# Altium PCB pcb.PcbDoc
Units mm, origin at the board's own origin, x right, y up, seen from the top; angles counter-clockwise.
Board outline 96.77 x 55.5 mm, 2 copper layers (Top Layer, Bottom Layer), stack 0.325 mm thick; 80 components, 66 nets, 417 pads, 79 vias.
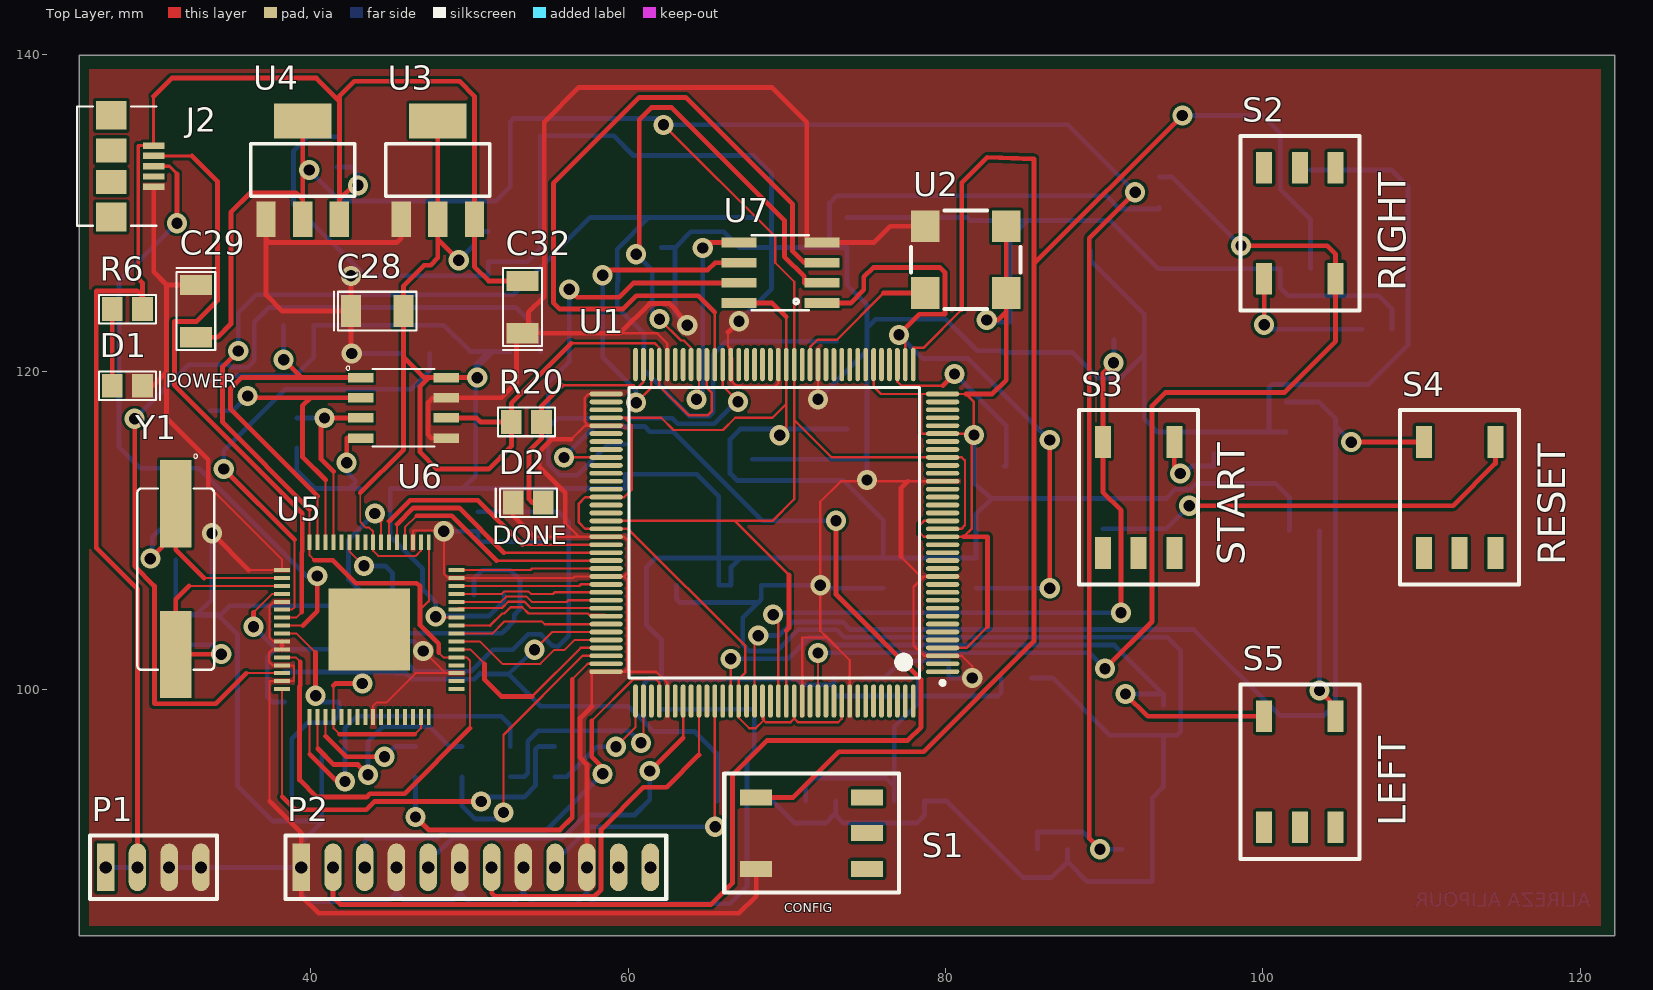
[diagram p0: Top Layer view]
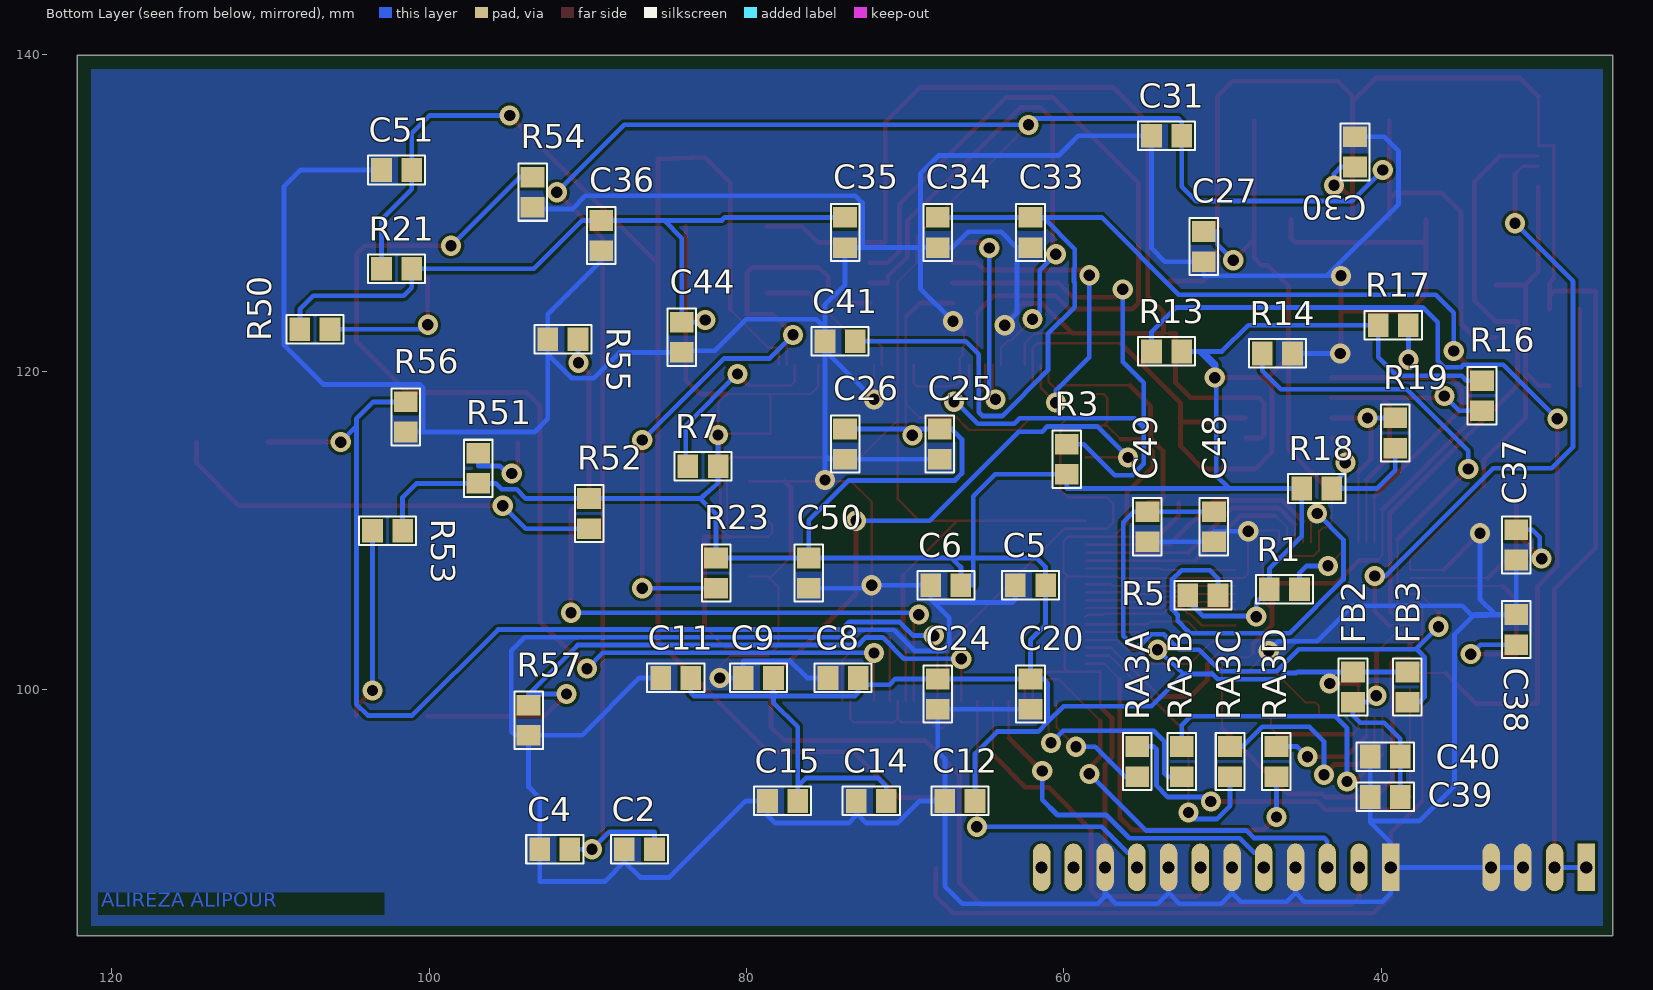
[diagram p1: Bottom Layer view, seen from below]
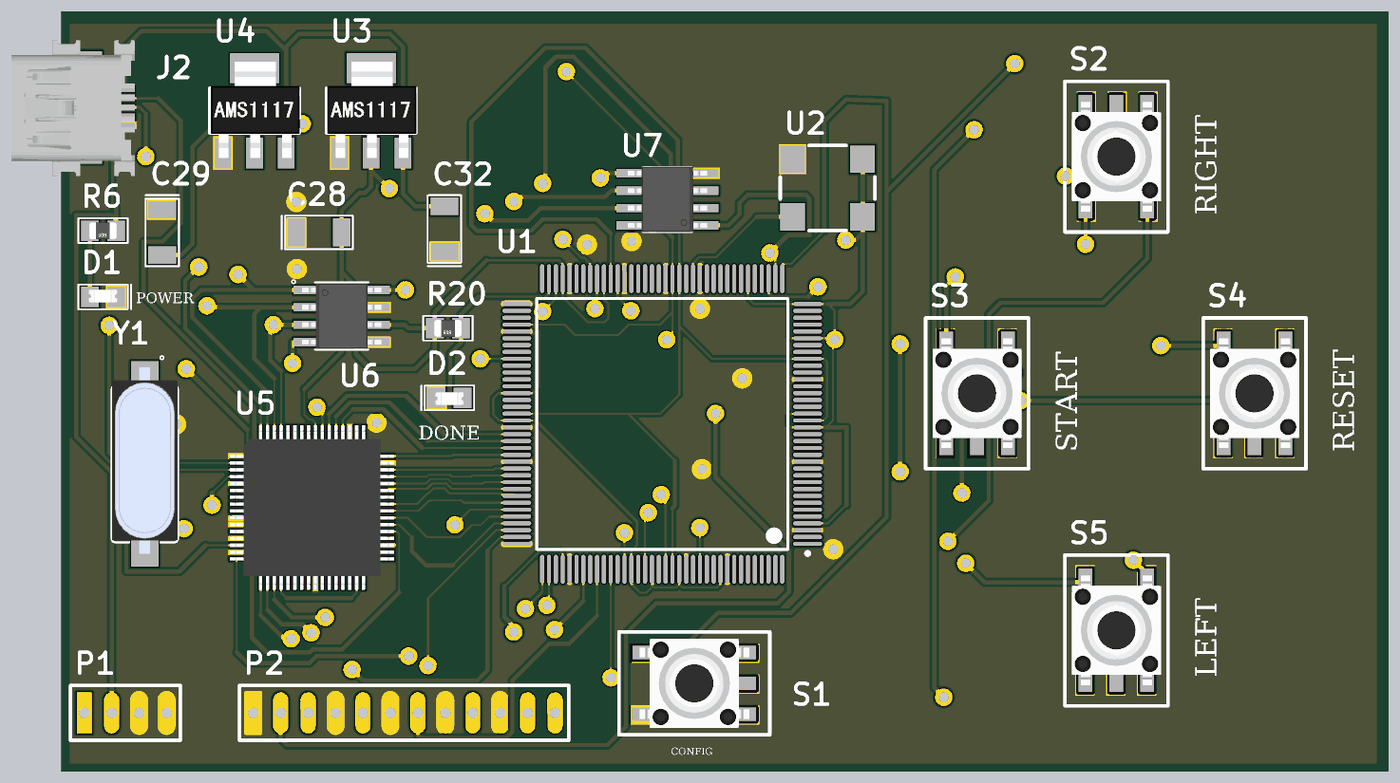
[diagram p2: 3D render of the assembled board from above, using the file's embedded part models]
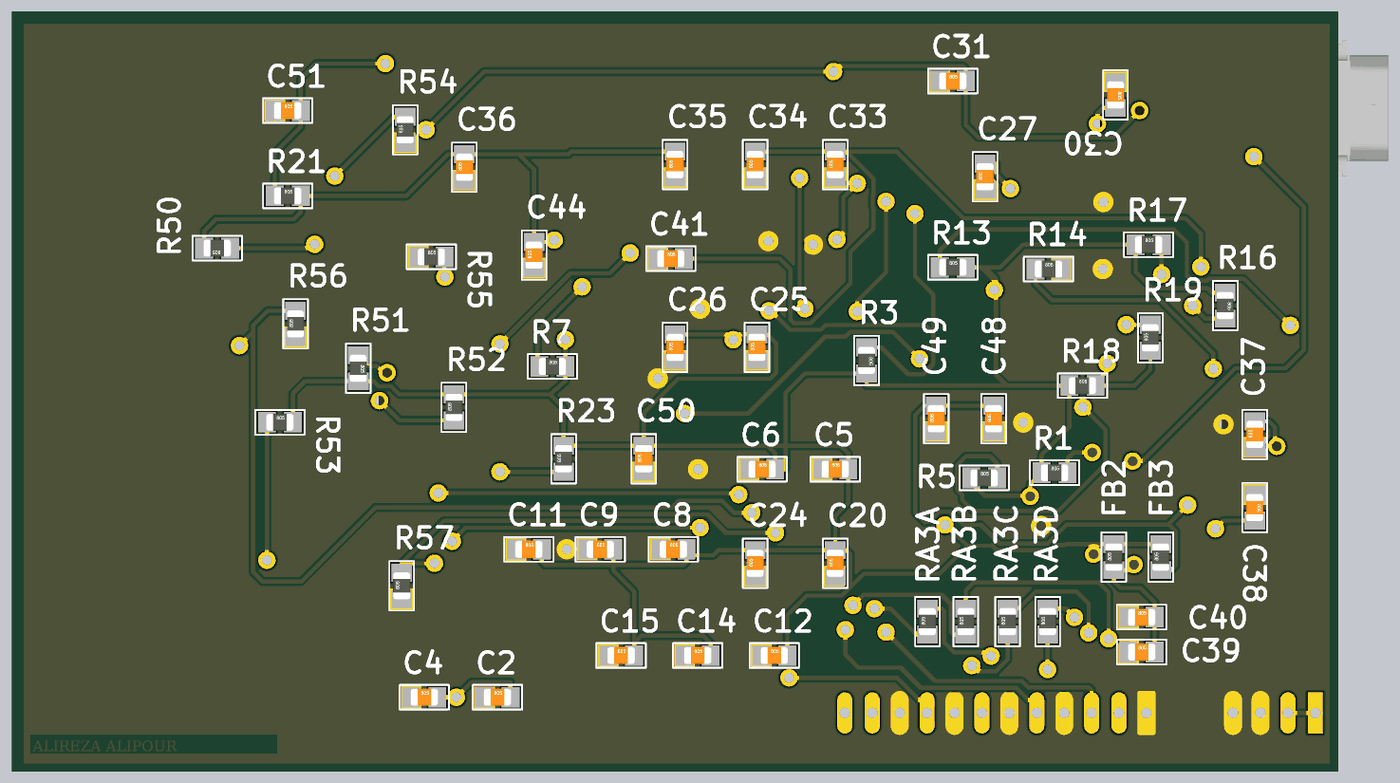
[diagram p3: 3D render of the assembled board from below, using the file's embedded part models]

## Layer stack, top to bottom
Top Solder: solder mask 0.0102, Solder Resist, Dk 3.5
Top Layer: signal copper 0.0356
Dielectric 1: core 0.254, FR-4, Dk 4.2
Bottom Layer: signal copper 0.0356
Bottom Solder: solder mask 0.0102, Solder Resist, Dk 3.5

## Board outline
25.4,84.455 122.174,84.455 122.174,139.954 25.4,139.954

## Design rules (kind name [scope] priority, off if disabled: settings)
Clearance [All] p1: gap=0.18 ignorepadtopadclearanceinfootprint=FALSE
PlaneConnect [All] p1: planeconnectstyle=Direct reliefexpansion=0.508 reliefentries=4 reliefconductorwidth=0.254 reliefairgap=0.254
PolygonConnect [All] p1: connectstyle=Direct reliefconductorwidth=0.254 reliefentries=4 polygonreliefangle="90 Angle" airgapwidth=0.254
RoutingVias [All] p1: holewidth=0.711 width=1.27 viastyle="Through Hole" minholewidth=0.711 minwidth=1.27 maxholewidth=0.711 maxwidth=1.27
SMDNeckDown [All] p1: percent=50.000
SolderMaskExpansion [All] p1: expansion=0.102
Width [All] p1: maxlimit=0.9 minlimit=0.2 preferedwidth=0.3
29 further rules are at their usual default settings.

## Classes and differential pairs
component class s1: C27 C28 C29 C30 C31 C32 D1 R6 U3 U4
component class s2: C2 C4 C5 C6 C8 C9 C11 C12 C14 C15 C20 C24 C25 C26 C50 C51 D2 R3 R7 R20 R21 R23 RA3A RA3B RA3C RA3D S1 U1 U2 U7
component class s4: C33 C34 C35 C36 C37 C38 C39 C40 C41 C44 C48 C49 FB2 FB3 J2 P1 P2 R1 R5 R13 R14 R16 R17 R18 R19 R50 R51 R52 R53 R54 R55 R56 R57 S2 S3 S4 S5 U5 U6 Y1
net class FT_FIFO: FT_D0 FT_D1 FT_D2 FT_D3 FT_D4 FT_D5 FT_D6 FT_D7 FT_RD_N FT_RXF_N FT_TXE_N FT_WR_N
net class FT_JTAG: FT_TCK FT_TDI FT_TDO FT_TMS

## Components (designator, comment, footprint, x,y, rotation, side; value= is the part's Value field where it differs from the comment)
C2 "Cap" "0805 CAP" 86.741,89.916 r180 bottom value=4.7uF
C4 "Cap" "0805 CAP" 92.075,89.916 r180 bottom value=0.47uF
C5 "Cap" "0805 CAP" 62.103,106.553 r180 bottom value=4.7uF
C6 "Cap" "0805 CAP" 67.437,106.553 r180 bottom value=0.47uF
C8 "Cap" "0805 CAP" 73.914,100.711 r180 bottom value=4.7uF
C9 "Cap" "0805 CAP" 79.248,100.711 r180 bottom value=0.47uF
C11 "Cap" "0805 CAP" 84.455,100.711 r180 bottom value=4.7uF
C12 "Cap" "0805 CAP" 66.548,92.964 r180 bottom value=0.47uF
C14 "Cap" "0805 CAP" 72.136,92.964 r180 bottom value=4.7uF
C15 "Cap" "0805 CAP" 77.724,92.964 r180 bottom value=0.47uF
C20 "Cap" "0805 CAP" 62.103,99.695 r90 bottom value=4.7uF
C24 "Cap" "0805 CAP" 67.945,99.695 r90 bottom value=0.47uF
C25 "Cap" "0805 CAP" 67.818,115.443 r90 bottom value=4.7uF
C26 "Cap" "0805 CAP" 73.787,115.443 r90 bottom value=100nF
C27 "Cap" "0805 CAP" 51.181,127.889 r90 bottom value=100nF
C28 "Tantalum" CT1206_TANTALUM-SMD-10UF-20V-20%(1206)(Primary) 44.196,123.825 r180 top value=10uF/16V
C29 "Tantalum" CT1206_TANTALUM-SMD-10UF-20V-20%(1206)(Primary) 32.766,123.825 r90 top value=10uF/16V
C30 "Cap" "0805 CAP" 41.656,133.858 r270 bottom value=100nF
C31 "Cap" "0805 CAP" 53.528,134.874 r180 bottom value=100nF
C32 "Tantalum" CT1206_TANTALUM-SMD-10UF-20V-20%(1206)(Primary) 53.34,124.079 r270 top value=47uF/10V
C33 "Cap" "0805 CAP" 62.103,128.778 r90 bottom value=4.7uF
C34 "Cap" "0805 CAP" 67.945,128.778 r90 bottom value=100nF
C35 "Cap" "0805 CAP" 73.787,128.778 r90 bottom value=100nF
C36 "27pF" "0805 CAP" 89.154,128.585 r90 bottom value=100nF
C37 "27pF" "0805 CAP" 31.496,109.093 r90 bottom
C38 "Cap" "0805 CAP" 31.496,103.759 r270 bottom value=27pF
C39 "27pF" "0805 CAP" 39.751,93.218 r180 bottom value=4.7uF
C40 "27pF" "0805 CAP" 39.751,95.758 r180 bottom value=100nF
C41 "Cap" "0805 CAP" 74.102,121.92 r180 bottom value=100nF
C44 "Cap" "0805 CAP" 84.074,122.174 r90 bottom value=100nF
C48 "27pF" "0805 CAP" 50.546,110.236 r90 bottom value=4.7uF
C49 "27pF" "0805 CAP" 54.737,110.236 r90 bottom value=100nF
C50 "Cap" "0805 CAP" 76.073,107.315 r90 bottom value=100nF
C51 "Cap" "0805 CAP" 102.042,132.715 r180 bottom value=100nF
D1 "RED" "0805 LED" 28.448,119.126 r0 top
D2 "Green" "0805 LED" 53.713,111.76 r180 top
FB2 "Res1" "0805 RES" 41.783,100.137 r90 bottom value="600R, 0.5A"
FB3 "Res1" "0805 RES" 38.354,100.137 r90 bottom value="600R, 0.5A"
J2 "105017-0001" MOLEX_105017-0001 27.432,132.953 r270 top
P1 "MHDR1X4" "4 PIN" 27.083,88.773 r0 top
P2 "MHDR1X12" "12 PIN" 39.403,88.773 r0 top
R1 "Res1" "0805 RES" 46.101,106.299 r180 bottom value=4.7K
R3 "Res1" "0805 RES" 59.817,114.488 r270 bottom value=4.7K
R5 "Res1" "0805 RES" 51.242,105.918 r180 bottom value=4.7K
R6 "1.2K" "0805 RES" 28.448,123.952 r180 top
R7 "Res1" "0805 RES" 82.738,114.046 r180 bottom value=4.7K
R13 "Res1" "0805 RES" 53.528,121.285 r180 bottom value=1.2K
R14 "Res1" "0805 RES" 46.548,121.158 r180 bottom value="12K 1%"
R16 "Res1" "0805 RES" 33.655,118.491 r270 bottom value=4.7K
R17 "Res1" "0805 RES" 39.243,122.936 r180 bottom value=4.7K
R18 "Res1" "0805 RES" 44.069,112.649 r180 bottom value=4.7K
R19 "Res1" "0805 RES" 39.116,116.144 r90 bottom value=2.2K
R20 "Res1" "0805 RES" 53.594,116.84 r180 top value=330
R21 "Res1" "0805 RES" 102.042,126.492 r180 bottom value=4.7K
R23 "Res1" "0805 RES" 81.915,107.315 r90 bottom value=4.7K
R50 "Res1" "0805 RES" 107.188,122.682 r0 bottom value=470
R51 "Res1" "0805 RES" 96.901,113.919 r270 bottom value=470
R52 "Res1" "0805 RES" 89.916,111.064 r90 bottom value=470
R53 "Res1" "0805 RES" 102.616,109.982 r180 bottom value=470
R54 "Res1" "0805 RES" 93.472,131.318 r90 bottom value=10K
R55 "Res1" "0805 RES" 91.567,122.047 r180 bottom value=10K
R56 "Res1" "0805 RES" 101.473,117.155 r90 bottom value=10K
R57 "Res1" "0805 RES" 93.726,98.044 r90 bottom value=10K
RA3A "Res1" "0805 RES" 55.372,95.438 r90 bottom value=22
RA3B "Res1" "0805 RES" 52.578,95.438 r90 bottom value=22
RA3C "Res1" "0805 RES" 49.53,95.438 r90 bottom value=22
RA3D "Res1" "0805 RES" 46.609,95.438 r90 bottom value=22
S1 "SW-PB" "Tack Switch" 66.557,92.182 r90 top
S2 "SW-PB" "Tack Switch" 101.076,124.357 r180 top
S3 "SW-PB" "Tack Switch" 93.416,117.085 r0 top
S4 "SW-PB" "Tack Switch" 113.645,117.085 r0 top
S5 "SW-PB" "Tack Switch" 103.576,99.798 r0 top
U1 "XC6SLX9-2TQG144C" TQG144_M 69.215,109.855 r180 top
U2 "50MHz Osillator - MEC" "50MHz Osillator - MEC" 89.22,128.468 r180 top
U3 "AMS1117-3V3" AMS1117_AMS1117(Primary) 48.006,132.715 r0 top
U4 "AMS1117-1V2" AMS1117_AMS1117(Primary) 39.497,132.715 r0 top
U5 "FT2232HL" LQFP64 43.688,103.759 r0 top
U6 "M93C56MN" SOIC127P600X175-8N 45.847,117.729 r0 top
U7 "W25Q64FV" "SO08 - duplicate" 69.596,126.238 r90 top
Y1 "12MHz" XTAL1170X500X450 31.496,106.934 r270 top

## Footprints (in the part's own frame and the unit in brackets; to place one, negate y for a bottom-side part, rotate by r counter-clockwise, add the part's x,y. Pads: shape width x height; smd on the part's side, far side on the other; paste and mask are expansions set on the pad)
"4 PIN" [mm]
  rect 1.1x3 hole 0.762: 1(0,0)
  oval 1.1x3 hole 0.762: 2(2,0) 3(4,0) 4(6,0)
  silkscreen extent -1,-2 7,2
"12 PIN" [mm]
  rect 1.1x3 hole 0.762: 1(0,0)
  oval 1.1x3 hole 0.762: 2(2,0) 3(4,0) 4(6,0) 5(8,0) 6(10,0) 7(12,0) 8(14,0) 9(16,0) 10(18,0) 11(20,0) 12(22,0)
  silkscreen extent -1,-2 23,2
"50MHz Osillator - MEC" [mm]
  rect 1.8x2 smd paste-25.4 mask-25.4: 1(5.4,-0.7) 2(10.5,-0.7) 3(10.5,3.5) 4(5.4,3.5)
  silkscreen extent 4.5,-1.7 11.4,4.5
"0805 CAP" [mm]
  rect 1.3x1.5 smd paste-25.4 mask-25.4: 1(-0.95,0) 2(0.95,0)
  silkscreen extent -1.8,-0.9 1.8,0.9, body extent -1,-0.62 1,0.62, height 0.78
"0805 LED" [mm]
  rect 1.3x1.5 smd paste-25.4 mask-25.4: 1(-0.95,0) 2(0.95,0)
  silkscreen extent -1.8,-0.9 2.05,0.9, body extent -1.03,-0.4 1.03,0.51, height 0.85
"0805 RES" [mm]
  rect 1.3x1.5 smd paste-25.4 mask-25.4: 1(-0.95,0) 2(0.95,0)
  silkscreen extent -1.8,-0.9 1.8,0.9, body extent -1,-0.63 1,0.63, height 0.78
AMS1117_AMS1117(Primary) [mil]
  rect 48x88 smd paste-1000 mask-1000: GND(-91,-122) VIN(91,-122) VOUT(0,-122)
  rect 141.73x86.61 smd paste-1000 mask-1000: HEATSINK(0,122.01)
  silkscreen extent -129,-65 129,65, body extent -126,-136 130,140, height 73
CT1206_TANTALUM-SMD-10UF-20V-20%(1206)(Primary) [mil]
  rect 50x80 smd paste-1000 mask-1000: 1(-65,0) 2(65,0)
  silkscreen extent -97,-48 107,48
LQFP64 [mm]
  rect 1x0.25 smd paste-25.4 mask-25.4: 1(-5.5,3.75) 2(-5.5,3.25) 3(-5.5,2.75) 4(-5.5,2.25) 5(-5.5,1.75) 6(-5.5,1.25) 7(-5.5,0.75) 8(-5.5,0.25) 9(-5.5,-0.25) 10(-5.5,-0.75) 11(-5.5,-1.25) 12(-5.5,-1.75) 13(-5.5,-2.25) 14(-5.5,-2.75) 15(-5.5,-3.25) 16(-5.5,-3.75) 33(5.5,-3.75) 34(5.5,-3.25) 35(5.5,-2.75) 36(5.5,-2.25) 37(5.5,-1.75) 38(5.5,-1.25) 39(5.5,-0.75) 40(5.5,-0.25) 41(5.5,0.25) 42(5.5,0.75) 43(5.5,1.25) 44(5.5,1.75) 45(5.5,2.25) 46(5.5,2.75) 47(5.5,3.25) 48(5.5,3.75)
  rect 0.25x1 smd paste-25.4 mask-25.4: 17(-3.75,-5.5) 18(-3.25,-5.5) 19(-2.75,-5.5) 20(-2.25,-5.5) 21(-1.75,-5.5) 22(-1.25,-5.5) 23(-0.75,-5.5) 24(-0.25,-5.5) 25(0.25,-5.5) 26(0.75,-5.5) 27(1.25,-5.5) 28(1.75,-5.5) 29(2.25,-5.5) 30(2.75,-5.5) 31(3.25,-5.5) 32(3.75,-5.5) 49(3.75,5.5) 50(3.25,5.5) 51(2.75,5.5) 52(2.25,5.5) 53(1.75,5.5) 54(1.25,5.5) 55(0.75,5.5) 56(0.25,5.5) 57(-0.25,5.5) 58(-0.75,5.5) 59(-1.25,5.5) 60(-1.75,5.5) 61(-2.25,5.5) 62(-2.75,5.5) 63(-3.25,5.5) 64(-3.75,5.5)
  rect 5.15x5.15 smd paste-25.4 mask-25.4: PAD(0,0)
  body extent -6,-6 6,6, height 1.56
MOLEX_105017-0001 [mm]
  rect 0.4x1.35 smd paste-25.4 mask-25.4: 1(-1.3,2.675) 2(-0.65,2.675) 3(0,2.675) 4(0.65,2.675) 5(1.3,2.675)
  rect 1.5x1.9 smd paste-25.4 mask-25.4: P$8(-1,0) P$9(1,0)
  rect 1.8x1.9 smd paste-25.4 mask-25.4: P$10(-3.2,0) P$11(3.2,0)
  silkscreen extent -3.75,-2.15 3.75,2.85, body extent -4.9,-5.65 5,3.35, height 3.95
"SO08 - duplicate" [mil]
  rect 24x87 smd paste-1000 mask-1000: 1(-75,-103) 2(-25,-103) 3(25,-103) 4(75,-103) 5(75,103) 6(25,103) 7(-25,103) 8(-75,103)
  silkscreen extent -93,-71 93,71, body extent -94,-114 94,114, height 69
SOIC127P600X175-8N [mm]
  rect 1.6x0.6 smd paste-25.4 mask-25.4: 1(-2.7,1.905) 2(-2.7,0.635) 3(-2.7,-0.635) 4(-2.7,-1.905) 5(2.7,-1.905) 6(2.7,-0.635) 7(2.7,0.635) 8(2.7,1.905)
  silkscreen extent -3.63,-2.45 1.95,2.63, body extent -2.9,-2.4 2.9,2.4, height 1.75
"Tack Switch" [mm]
  rect 1x2 smd paste-25.4 mask-25.4: 1(-3.5,-1.5) 2(-3.5,-8.5) 3(1,-1.5) 4(1,-8.5) 5(-1.25,-8.5)
  silkscreen extent -5,-10.5 2.5,0.5, body extent -4.5,-9 2,-1, height 5
TQG144_M [mm] "Thin QFP, 144-Leads, Body 20x20mm, Pitch 0.5mm, IPC Low Density"
  oval 2.1x0.3 smd: 1(-10.6,8.75) 2(-10.6,8.25) 3(-10.6,7.75) 4(-10.6,7.25) 5(-10.6,6.75) 6(-10.6,6.25) 7(-10.6,5.75) 8(-10.6,5.25) 9(-10.6,4.75) 10(-10.6,4.25) 11(-10.6,3.75) 12(-10.6,3.25) 13(-10.6,2.75) 14(-10.6,2.25) 15(-10.6,1.75) 16(-10.6,1.25) 17(-10.6,0.75) 18(-10.6,0.25) 19(-10.6,-0.25) 20(-10.6,-0.75) 21(-10.6,-1.25) 22(-10.6,-1.75) 23(-10.6,-2.25) 24(-10.6,-2.75) 25(-10.6,-3.25) 26(-10.6,-3.75) 27(-10.6,-4.25) 28(-10.6,-4.75) 29(-10.6,-5.25) 30(-10.6,-5.75) 31(-10.6,-6.25) 32(-10.6,-6.75) 33(-10.6,-7.25) 34(-10.6,-7.75) 35(-10.6,-8.25) 36(-10.6,-8.75) 73(10.6,-8.75) 74(10.6,-8.25) 75(10.6,-7.75) 76(10.6,-7.25) 77(10.6,-6.75) 78(10.6,-6.25) 79(10.6,-5.75) 80(10.6,-5.25) 81(10.6,-4.75) 82(10.6,-4.25) 83(10.6,-3.75) 84(10.6,-3.25) 85(10.6,-2.75) 86(10.6,-2.25) 87(10.6,-1.75) 88(10.6,-1.25) 89(10.6,-0.75) 90(10.6,-0.25) 91(10.6,0.25) 92(10.6,0.75) 93(10.6,1.25) 94(10.6,1.75) 95(10.6,2.25) 96(10.6,2.75) 97(10.6,3.25) 98(10.6,3.75) 99(10.6,4.25) 100(10.6,4.75) 101(10.6,5.25) 102(10.6,5.75) 103(10.6,6.25) 104(10.6,6.75) 105(10.6,7.25) 106(10.6,7.75) 107(10.6,8.25) 108(10.6,8.75)
  oval 0.3x2.1 smd: 37(-8.75,-10.6) 38(-8.25,-10.6) 39(-7.75,-10.6) 40(-7.25,-10.6) 41(-6.75,-10.6) 42(-6.25,-10.6) 43(-5.75,-10.6) 44(-5.25,-10.6) 45(-4.75,-10.6) 46(-4.25,-10.6) 47(-3.75,-10.6) 48(-3.25,-10.6) 49(-2.75,-10.6) 50(-2.25,-10.6) 51(-1.75,-10.6) 52(-1.25,-10.6) 53(-0.75,-10.6) 54(-0.25,-10.6) 55(0.25,-10.6) 56(0.75,-10.6) 57(1.25,-10.6) 58(1.75,-10.6) 59(2.25,-10.6) 60(2.75,-10.6) 61(3.25,-10.6) 62(3.75,-10.6) 63(4.25,-10.6) 64(4.75,-10.6) 65(5.25,-10.6) 66(5.75,-10.6) 67(6.25,-10.6) 68(6.75,-10.6) 69(7.25,-10.6) 70(7.75,-10.6) 71(8.25,-10.6) 72(8.75,-10.6) 109(8.75,10.6) 110(8.25,10.6) 111(7.75,10.6) 112(7.25,10.6) 113(6.75,10.6) 114(6.25,10.6) 115(5.75,10.6) 116(5.25,10.6) 117(4.75,10.6) 118(4.25,10.6) 119(3.75,10.6) 120(3.25,10.6) 121(2.75,10.6) 122(2.25,10.6) 123(1.75,10.6) 124(1.25,10.6) 125(0.75,10.6) 126(0.25,10.6) 127(-0.25,10.6) 128(-0.75,10.6) 129(-1.25,10.6) 130(-1.75,10.6) 131(-2.25,10.6) 132(-2.75,10.6) 133(-3.25,10.6) 134(-3.75,10.6) 135(-4.25,10.6) 136(-4.75,10.6) 137(-5.25,10.6) 138(-5.75,10.6) 139(-6.25,10.6) 140(-6.75,10.6) 141(-7.25,10.6) 142(-7.75,10.6) 143(-8.25,10.6) 144(-8.75,10.6)
  silkscreen extent -10.73,-9.15 9.15,9.57, body extent -10,-10 10,10, height 1.6
XTAL1170X500X450 [mm]
  rect 5.5x2 smd paste-25.4 mask-25.4: 1(-4.75,0) 2(4.75,0)
  silkscreen extent -7.88,-2.41 5.72,2.41, body extent -7.04,-2.4 6.54,2.4, height 3.85

## Part data
C2 C4 C5 C6 C8 C9 C11 C12 C14 C15 C20 C24 C25 C26 C27 C30 C31 C33 C34 C35 C38 C41 C44 C50 C51: "Capacitor", LatestRevisionDate=17-Jul-2002, LatestRevisionNote="Re-released for DXP Platform.", PackageDescription="Radial Cap, Thru-Hole; 2 Leads; 0.3 in Pin Spacing", PackageReference=RAD-0.3, Published=8-Jun-2000, Publisher="Altium Limited"
C28 C29 C32: library part "Cap Pol3", "Polarized Capacitor (Surface Mount)", LatestRevisionDate=29-May-2009, LatestRevisionNote="IPC-7351 Footprint Added.", PackageDescription="Chip Capacitor", PackageReference=C0805, Published=8-Jun-2000, Publisher="Altium Limited"
C36 C37 C39 C40 C48 C49: library part Cap, "Capacitor", LatestRevisionDate=17-Jul-2002, LatestRevisionNote="Re-released for DXP Platform.", PackageDescription="Radial Cap, Thru-Hole; 2 Leads; 0.3 in Pin Spacing", PackageReference=RAD-0.3, Published=8-Jun-2000, Publisher="Altium Limited"
D1 D2: library part LED0, "Typical INFRARED GaAs LED", LatestRevisionDate=08-Jul-2005, LatestRevisionNote="Mech Layer 1 removed.", PackageDescription="LED; 2 Leads", PackageReference=LED-0, Published=8-Jun-2000, Publisher="Altium Limited"
FB2 FB3 R1 R3 R5 R7 R13 R14 R16 R17 R18 R19 R20 R21 R23 R50 R51 R52 R53 R54 R55 R56 R57 RA3A RA3B RA3C RA3D: "Resistor", LatestRevisionDate=17-Jul-2002, LatestRevisionNote="Re-released for DXP Platform.", PackageDescription="Axial Device, Thru-Hole; 2 Leads; 0.3 in Pin Spacing", PackageReference=AXIAL-0.3, Published=8-Jun-2000, Publisher="Altium Limited"
J2: "Conn USB Type B M 5 POS 0.65mm Solder RA Thru-Hole 5 Terminal 1 Port Embossed T/R", Package=None, Availability=Good, MF=Molex, MP=105017-0001, Price="0.47 USD"
P1: "Header, 4-Pin", LatestRevisionDate=17-Jul-2002, LatestRevisionNote="Re-released for DXP Platform.", Publisher="Altium Limited"
P2: "Header, 12-Pin", LatestRevisionDate=17-Jul-2002, LatestRevisionNote="Re-released for DXP Platform.", Publisher="Altium Limited"
R6: library part Res1, "Resistor", LatestRevisionDate=17-Jul-2002, LatestRevisionNote="Re-released for DXP Platform.", PackageDescription="Axial Device, Thru-Hole; 2 Leads; 0.3 in Pin Spacing", PackageReference=AXIAL-0.3, Published=8-Jun-2000, Publisher="Altium Limited"
S1 S2 S3 S4 S5: "Switch", LatestRevisionDate=17-Jul-2002, LatestRevisionNote="Re-released for DXP Platform.", PackageDescription="Switch; 2 Leads", PackageReference=SPST-2, Published=24-Mar-1999, Publisher="Altium Limited"
U1: "Spartan-6 LX 1.2V FPGA, 102 User I/Os, 144-Pin TQFP (0.5mm Pitch), Speed Grade 2, Commercial Grade, Pb-Free", Code_JEDEC=MS-026-BFB, ComponentLink1Description="Manufacturer URL", ComponentLink1URL=http://www.xilinx.com/, ComponentLink2Description="Spartan-6 Datasheet", ComponentLink2URL=http://www.xilinx.com/support/documentation/data_sheets/ds160.pdf, ComponentLink3Description="Spartan-6 Documents", ComponentLink3URL=http://www.xilinx.com/support/documentation/spartan-6.htm, DatasheetVersion="ver1.6, Nov-2010", PackageDescription="144-Pin Thin Quad Flat Pack (TQG144) - Pb-Free", PackageReference=TQG144, PackageVersion="ver1.2, Jun-2004"
U3 U4: library part AMS1117, "Integrated Circuit", Package="UFQFN-24 Advanced Monolithic Systems", Availability=Unavailable, MF="Advanced Monolithic Systems", MP=AMS1117, Price=None
Y1: library part XTAL, "Crystal Oscillator", LatestRevisionDate=17-Jul-2002, LatestRevisionNote="Re-released for DXP Platform.", PackageDescription="Crystal, Thru-Hole; 2 Leads; Body 3.1 x 8.2 mm (Dia.xH)", PackageReference=R38, Published=8-Jun-2000, Publisher="Altium Limited"

## Via types
v1: diameter 1.27, hole 0.711, Top Layer to Bottom Layer, 79 vias

## Nets (pads, with @x,y where several pads share a name; then routed paths per layer and width w, separated by ;. In a path a pad name is that pad's centre, name@x,y a point inside that pad or via, vN(x,y) a via of type N, cw(c..) or ccw(c..) an arc to the next point about the centre after c; other vN are vias at no path point)
BLUE: P2.9 U1.119 | length 19.6
  Top Layer w0.15: v1@65.465,91.355 U1.119
  Top Layer w0.3: v1@65.465,91.355 v1(65.481,91.338)
  Bottom Layer w0.3: P2.9 55.403,89.713 55.996,89.713 57.621,91.338 v1(65.481,91.338)
EECLK: R16.2 U5.62 U6.2 | length 19.8
  Top Layer w0.125: U5.62 40.938,113.183
  Top Layer w0.3: v1(36.027,118.475) 36.138,118.364 39.989,118.364 ; 40.938,113.183 39.481,114.64 39.481,117.856 39.989,118.364 ; U6.2 39.989,118.364
  Bottom Layer w0.3: R16.2 35.093,117.541 v1(36.027,118.475)
EECS: R17.2 U5.63 U6.1 | length 24.2
  Top Layer w0.125: U5.63 40.438,112.165
  Top Layer w0.3: v1(38.293,120.762) 39.421,119.634 ; 40.438,112.165 34.95,117.653 34.95,118.948 35.636,119.634 39.421,119.634 ; U6.1 39.421,119.634
  Bottom Layer w0.3: v1(38.293,120.762) R17.2
EEDATA: R19.2 U5.61 U6.3 | length 12.3
  Top Layer w0.125: U5.61 41.438,113.715
  Top Layer w0.3: 41.438,113.715 40.64,114.513 40.64,116.865 v1(40.869,117.094) U6.3
  Bottom Layer w0.3: R19.2 v1(40.869,117.094)
FPGA_CCLK: U1.70 U7.6 | length 20.6
  Top Layer w0.15: v1(60.503,118.059) 61.465,119.021 U1.70
  Top Layer w0.3: v1(58.395,126.086) 58.729,126.42 65.024,126.42 65.477,126.873 U7.6
  Bottom Layer w0.3: v1(58.395,126.086) 58.395,120.904 60.503,118.796 v1(60.503,118.059)
FPGA_CLK: U1.50 U2.3 | length 9.8
  Top Layer w0.15: U1.50 71.465,121.554 71.933,122.022 73.152,122.022 76.098,124.968
  Top Layer w0.3: 76.098,124.968 U2.3
FPGA_CSO_B: R23.1 U1.38 U7.1 | length 43.9
  Top Layer w0.15: v1(77.064,122.326) v1@77.465,121.925 ; U1.38 v1@77.465,121.925 ; v1@77.465,122.733 v1@77.465,121.925
  Top Layer w0.3: U7.1 74.016,124.333 74.854,125.171 74.854,125.984 75.438,126.568 79.654,126.568 79.96,126.263 79.96,123.622 78.354,123.622 v1@77.465,122.733 ; v1(86.563,106.365) v1(86.563,115.697)
  Bottom Layer w0.3: v1(77.064,122.326) 78.552,120.838 81.423,120.838 v1(86.563,115.697) ; R23.1 v1(86.563,106.365)
FPGA_DIN: U1.64 U7.5 | length 14.4
  Top Layer w0.15: v1(64.313,118.262) 64.465,118.414 U1.64
  Top Layer w0.3: v1(64.704,127.797) 65.049,128.143 U7.5
  Bottom Layer w0.3: v1(64.313,118.262) 64.704,118.653 v1(64.704,127.797)
FPGA_DONE: D2.1 R20.1 U1.71 | length 15.5
  Top Layer w0.15: 55.839,119.151 60.35,119.151 60.543,118.959 60.565,118.959 60.965,119.36 U1.71
  Top Layer w0.3: D2.1 53.965,111.76 53.762,111.963 53.762,115.017 54.544,115.799 R20.1 54.544,117.856 55.839,119.151
FPGA_INT_B: R7.1 U1.39 | length 12.4
  Top Layer w0.15: U1.39 76.965,119.377 77.216,119.126 79.832,119.126
  Top Layer w0.3: 79.832,119.126 v1(80.569,119.863)
  Bottom Layer w0.3: v1(80.569,119.863) 83.82,116.611 83.82,114.046 R7.1
FPGA_M0: C5.2 C6.2 C8.2 C9.2 C11.2 C12.2 C14.2 C15.2 C20.2 C24.2 C25.2 C26.2 C27.2 C28.1 C35.2 C36.2 C44.2 C50.2 FB2.2 FB3.2 R1.1 R3.2 R5.1 R7.2 R13.2 R16.1 R17.1 R18.1 R20.2 R21.2 R23.2 R50.2 R51.2 R52.2 R53.2 U1.4 U1.18 U1.20 U1.31 U1.36 U1.42 U1.53 U1.63 U1.69 U1.76 U1.86 U1.90 U1.103 U1.122 U1.125 U1.129 U1.135 U2.1 U2.4 U3.HEATSINK U3.VOUT U5.20 U5.31 U5.42 U5.50 U5.56 U6.6 U6.8 U7.8 | length 502.1
  Top Layer w0.125: 41.438,100.239 U5.20 41.438,97.536 41.818,97.156 ; 43.121,112.368 43.121,110.541 43.475,110.187 43.688,110.187 43.938,109.937 U5.56 43.938,108.712 44.243,108.407 46.633,108.407 46.938,108.712 U5.50 ; 46.558,97.156 46.938,97.536 U5.31 ; v1@47.942,104.509 U5.42
  Top Layer w0.15: v1(54.102,102.489) 55.218,103.605 U1.103 ; 56.413,121.793 61.686,121.793 61.965,121.514 U1.69 61.965,119.112 63.805,117.272 65.024,117.272 65.278,117.526 65.278,118.663 64.965,118.976 U1.63 ; U1.76 59.755,117.105 ; v1(69.545,116.002) 69.965,116.422 69.965,117.982 ; 69.965,123.456 U1.53 69.965,117.982 ; U1.129 70.465,98.146 ; U1.135 73.465,98.146 73.236,97.917 70.694,97.917 70.465,98.146 ; U1.42 75.465,119.075 75.935,118.605 78.486,118.605 ; U1.4 81.32,102.605 82.648,103.933 ; U1.20 78.638,110.605 78.386,110.353 78.386,109.849 78.63,109.605 U1.18 81.132,109.605 81.661,110.134 81.661,115.824 81.38,116.105 U1.31 78.486,116.105 78.486,118.605 ; v1(81.788,116.014) 81.788,118.097 81.28,118.605 U1.36 78.486,118.605 ; 59.755,117.105 62.088,117.105 62.861,116.332 65.982,116.332 66.755,117.105 69.088,117.105 69.965,117.982 ; 59.755,117.105 60.223,116.637 60.223,112.573 59.756,112.105 U1.86 57.302,112.105 56.896,111.699 56.896,110.511 57.302,110.105 U1.90 59.995,110.105 67.386,102.714 67.386,101.056 66.965,100.635 U1.122 66.965,98.199 67.628,97.536 68.035,97.536 68.549,98.05 ; 68.549,98.05 68.682,97.917 70.236,97.917 70.465,98.146 ; 68.549,98.05 68.465,98.134 U1.125 68.549,98.05
  Top Layer w0.3: 41.438,100.239 41.554,100.355 v1(43.256,100.355) ; 41.818,97.156 46.558,97.156 ; 43.121,112.368 45.847,115.094 45.847,120.929 ; v1(47.879,104.572) v1@47.942,104.509 ; U3.HEATSINK U3.VOUT 48.006,128.346 ; U6.6 50.444,117.094 50.698,116.84 R20.2 ; v1(49.327,127.025) 48.006,128.346 ; v1(50.495,119.634) U6.8 47.447,119.634 ; 56.413,121.793 52.644,118.024 R20.2 ; U7.8 69.088,124.333 69.965,123.456 ; 81.132,109.605 82.648,109.605 82.648,103.933 ; 81.28,118.605 82.943,118.605 83.82,119.482 83.82,123.774 ; v1(82.601,123.266) 83.312,123.266 83.82,123.774 ; U2.1 U2.4 83.82,123.774 ; 45.847,120.929 C28.1 45.847,125.425 47.142,126.721 47.549,126.721 48.006,127.178 48.006,128.346 ; 45.847,120.929 47.142,119.634 47.447,119.634 ; 47.447,119.634 46.888,119.075 46.888,114.935 47.955,113.868 51.206,113.868 52.644,115.306 R20.2
  Bottom Layer w0.254: 52.451,100.965 v1(54.102,102.489)
  Bottom Layer w0.3: R16.1 34.636,119.441 34.941,119.745 39.014,119.745 40.193,120.924 R17.1 48.387,122.936 50.038,121.285 51.206,121.285 ; FB3.2 FB2.2 42.875,101.087 ; v1(43.256,100.355) 43.256,100.706 42.875,101.087 ; v1(47.879,104.572) v1@47.879,104.694 ; v1(49.327,127.025) 50.343,128.041 50.343,128.839 C27.2 ; v1(50.495,119.634) 50.495,120.294 51.486,121.285 ; R5.1 52.192,105.572 51.238,104.618 47.955,104.618 v1@47.879,104.694 ; R13.2 51.486,121.285 ; C12.2 65.598,95.946 64.211,97.333 61.62,97.333 61.011,97.942 ; v1(69.545,116.002) v1@69.936,116.393 ; C14.2 71.186,93.878 71.719,94.412 76.241,94.412 76.774,93.878 ; C8.2 C8.2@72.964,100.281 ; C26.2 v1@69.936,116.393 ; C35.2 81.356,129.728 81.549,129.535 85.187,129.535 ; C15.2 76.774,93.878 ; C9.2 78.298,99.771 ; v1(81.788,116.014) R7.2 81.788,112.979 82.906,112.014 ; v1(82.601,123.266) 82.743,123.124 C44.2 84.074,128.422 85.187,129.535 ; C11.2 83.505,99.771 83.302,99.568 78.501,99.568 78.298,99.771 ; R53.2 101.666,112.09 100.787,112.969 R51.2 95.79,112.969 95.428,112.607 94.488,112.607 93.895,112.014 R52.2 82.906,112.014 ; R50.2 108.138,123.942 107.29,124.79 101.6,124.79 101.092,125.298 R21.2 93.391,126.492 90.348,129.535 C36.2 85.187,129.535 ; 42.875,101.087 45.293,101.087 45.364,101.016 46.004,101.016 46.384,100.636 50.306,100.636 50.686,101.016 50.737,100.965 52.451,100.965 54.483,98.933 60.02,98.933 61.011,97.942 ; v1@47.879,104.694 47.879,105.471 R1.1 47.051,107.594 45.019,109.626 R18.1 49.581,112.649 ; 49.581,112.649 59.817,112.649 R3.2 64.338,113.538 65.71,112.166 65.71,108.265 ; 49.581,112.649 50.394,113.462 50.394,120.472 51.206,121.285 ; 51.206,121.285 51.486,121.285 ; 61.011,97.942 61.011,100.381 61.275,100.645 C20.2 ; C20.2 C24.2 70.62,100.645 70.984,100.281 C8.2@72.964,100.281 ; C20.2 62.103,103.124 61.153,104.074 C5.2 61.153,107.696 61.722,108.265 65.71,108.265 ; 65.71,108.265 67.056,108.265 ; 65.71,108.265 65.71,106.553 C6.2 66.487,107.696 67.056,108.265 ; 67.056,108.265 C50.2 ; v1@69.936,116.393 C25.2 67.056,116.393 66.421,115.758 66.421,113.596 66.86,113.157 73.561,113.157 76.073,110.645 C50.2 ; C8.2@72.964,100.281 72.964,99.771 73.167,99.568 78.095,99.568 78.298,99.771 ; C50.2 R23.2 81.915,111.023 82.906,112.014 ; 76.774,93.878 76.774,97.638 78.298,99.162 78.298,99.771
FPGA_M1: 
FPGA_MISO1: U1.65 U7.2 | length 35
  Top Layer w0.15: v1(61.976,123.317) 63.322,121.971 63.508,121.971 63.965,121.514 U1.65
  Top Layer w0.3: v1(60.503,127.406) 60.706,127.61 60.706,135.89 61.468,136.652 62.738,136.652 69.85,129.54 69.85,127.254 71.095,126.009 71.095,125.603 U7.2
  Bottom Layer w0.3: v1(60.503,127.406) 61.519,126.39 61.519,123.774 v1(61.976,123.317)
FPGA_MISO2: U1.62 U7.3 | length 47.1
  Top Layer w0.15: U1.62 65.465,123.749
  Top Layer w0.3: 65.465,123.749 64.421,124.793 60.511,124.793 59.67,123.952 55.702,123.952 55.296,124.358 55.296,131.877 60.706,137.287 63.627,137.287 70.358,130.556 70.358,127.61 71.095,126.873 U7.3
FPGA_MISO3: R3.1 U1.61 U7.7 | length 44.4
  Top Layer w0.15: U1.61 65.965,119.099 66.929,118.135 v1(66.929,118.11)
  Top Layer w0.3: v1(56.286,125.197) 56.779,124.704 59.442,124.704 60.341,125.603 U7.7
  Bottom Layer w0.3: v1(56.286,125.197) 56.286,120.625 54.966,119.304 54.966,116.487 ; R3.1 58.745,115.438 56.794,113.487 55.677,113.487 54.966,114.198 54.966,116.487 ; v1(66.929,118.11) 66.802,118.11 65.413,116.721 63.131,116.721 62.779,117.073 55.551,117.073 54.966,116.487
FPGA_PROG_B: C51.2 R21.1 S1.3 U1.37 | length 99.5
  Top Layer w0.15: U1.37 77.965,121.526 78.634,121.526 81.026,123.918
  Top Layer w0.3: S1.3 70.398,93.182 73.279,96.063 78.613,96.063 85.573,103.022 85.573,126.797 ; 81.026,123.918 81.026,131.923 82.629,133.526 85.573,133.416 85.573,126.797 ; v1(94.92,136.144) 85.573,126.797
  Bottom Layer w0.3: v1(94.92,136.144) 99.974,136.144 101.092,135.026 C51.2 101.092,131.516 102.992,129.616 R21.1
FT_D0: U1.105 U5.38 | length 12.5
  Top Layer w0.125: U5.38 50.043,102.509 50.952,101.6
  Top Layer w0.15: 53.95,99.543 57.012,102.605 U1.105
  Top Layer w0.3: 50.952,101.6 50.952,100.609 52.019,99.543 53.95,99.543
FT_D1: U1.104 U5.39 | length 10.6
  Top Layer w0.125: U5.39 50.661,103.009 52.068,101.602 54.47,101.602 55.351,102.482 56,102.482 56.623,103.105
  Top Layer w0.15: 56.623,103.105 U1.104
FT_D2: U1.102 U5.40 | length 9.8
  Top Layer w0.125: U5.40 51.439,103.509 52.197,104.267 52.451,104.267 52.462,104.278 54.564,104.278 54.737,104.105
  Top Layer w0.15: 54.737,104.105 U1.102
FT_D3: U1.101 U5.41 | length 10.1
  Top Layer w0.125: U5.41 51.304,104.009
  Top Layer w0.15: 51.304,104.009 52.07,104.775 52.194,104.775 52.586,105.167 53.332,105.167 53.724,104.775 57.458,104.775 57.543,104.69 58.53,104.69 U1.101
FT_D4: U1.100 U5.43 | length 9.8
  Top Layer w0.15: U5.43 49.294,105.115 52.053,105.115 52.445,105.507 53.473,105.507 53.865,105.115 58.605,105.115 U1.100
FT_D5: U1.99 U5.44 | length 9.7
  Top Layer w0.125: U5.44 51.984,105.509 52.31,105.834 53.608,105.834 53.934,105.509 56.14,105.509
  Top Layer w0.15: 56.14,105.509 56.236,105.605 U1.99
FT_D6: U1.98 U5.45 | length 9.6
  Top Layer w0.125: U5.45 52.039,106.009 52.179,106.149 53.739,106.149 53.879,106.009 55.273,106.009
  Top Layer w0.15: 55.273,106.009 55.369,106.105 U1.98
FT_D7: U1.97 U5.46 | length 9.5
  Top Layer w0.125: U5.46 56.927,106.509
  Top Layer w0.15: 56.927,106.509 57.023,106.605 U1.97
FT_OSCI: C37.2 U5.2 Y1.1 | length 15.7
  Top Layer w0.125: 33.275,107.009 U5.2
  Top Layer w0.3: v1(29.896,108.229) Y1.1@31.496,109.83 ; Y1.1 Y1.1@31.496,109.83 ; 33.275,107.009 31.496,108.788 Y1.1@31.496,109.83
  Bottom Layer w0.3: v1(29.896,108.229) 30.023,108.356 30.023,109.586 30.48,110.043 C37.2
FT_OSCO: C38.2 U5.3 Y1.2 | length 16.5
  Top Layer w0.125: 32.341,106.509 U5.3
  Top Layer w0.3: Y1.2 Y1.2@31.496,102.21 ; 32.341,106.509 31.496,105.664 Y1.2@31.496,102.21 ; v1(34.366,102.21) Y1.2@31.496,102.21
  Bottom Layer w0.3: C38.2 33.767,102.809 v1(34.366,102.21)
FT_RD_N: U1.93 U5.53 | length 15.9
  Top Layer w0.125: U5.53 45.438,110.388
  Top Layer w0.15: 52.177,108.605 U1.93
  Top Layer w0.3: 45.438,110.388 46.471,111.422 49.36,111.422 52.177,108.605
FT_RXF_N: U1.95 U5.48 | length 9.5
  Top Layer w0.125: U5.48 53.848,107.509
  Top Layer w0.15: 53.848,107.509 53.944,107.605 U1.95
FT_TCK: RA3A.2 U5.16 | length 27.3
  Top Layer w0.125: U5.16 38.202,100.009 38.202,93.218
  Top Layer w0.3: 38.202,93.218 39.014,92.405 43.491,92.405 44.008,92.923 v1(50.739,92.923)
  Bottom Layer w0.3: v1(50.739,92.923) 51.018,93.202 53.441,93.202 54.158,93.919 54.158,96.205 54.341,96.388 RA3A.2
FT_TDI: RA3B.2 U5.17 | length 21
  Top Layer w0.125: 39.938,95.91 U5.17
  Top Layer w0.3: 39.938,95.91 41.665,94.183 v1(42.164,94.183)
  Bottom Layer w0.3: v1(42.164,94.183) 42.164,97.561 42.901,98.298 52.019,98.298 52.578,97.739 RA3B.2
FT_TDO: RA3C.2 U5.18 | length 14.8
  Top Layer w0.125: 40.438,96.265 U5.18
  Top Layer w0.3: 40.438,96.265 41.453,95.25 42.977,95.25 v1(43.612,94.615)
  Bottom Layer w0.3: v1(43.612,94.615) 43.612,96.723 44.526,97.638 47.498,97.638 48.748,96.388 RA3C.2
FT_TMS: RA3D.2 U5.19 | length 7.7
  Top Layer w0.125: 40.938,97.035 U5.19
  Top Layer w0.3: 40.938,97.035 42.225,95.748 v1(44.653,95.748)
  Bottom Layer w0.3: v1(44.653,95.748) 45.294,96.388 RA3D.2
FT_TXE_N: U1.94 U5.52 | length 15.1
  Top Layer w0.125: U5.52 45.938,110.195 46.674,110.932
  Top Layer w0.15: 51.712,108.105 U1.94
  Top Layer w0.3: 46.674,110.932 48.885,110.932 51.712,108.105
FT_WR_N: U1.92 U5.54 | length 16.7
  Top Layer w0.125: U5.54 44.938,110.586
  Top Layer w0.15: 53.345,109.105 U1.92
  Top Layer w0.3: 44.938,110.586 46.264,111.912 50.538,111.912 53.345,109.105
GND: C2.1 C4.1 C5.1 C6.1 C8.1 C9.1 C11.1 C12.1 C14.1 C15.1 C20.1 C24.1 C25.1 C26.1 C27.1 C28.2 C29.2 C30.1 C31.1 C32.2 C33.1 C34.1 C35.1 C36.1 C37.1 C38.1 C39.1 C40.1 C41.1 C44.1 C48.1 C49.1 C50.1 C51.1 D1.2 D2.2 J2.5 P1.3 P1.4 P2.1 P2.4 P2.6 P2.8 P2.10 R14.2 R54.1 R55.1 R56.1 R57.1 S1.1 U1.3 U1.13 U1.25 U1.49 U1.54 U1.60 U1.68 U1.73 U1.77 U1.91 U1.96 U1.108 U1.113 U1.130 U1.136 U2.2 U3.GND U4.GND U5.1 U5.5 U5.10 U5.11 U5.13 U5.15 U5.25 U5.35 U5.47 U5.51 U6.5 U6.7 U7.4 | length 766.6
  Top Layer w0.125: 33.544,112.817 38.176,108.184 U5.1@38.176,107.509 ; 36.103,107.509 U5.1@38.176,107.509 ; 37.414,92.946 37.414,100.509 U5.15 38.941,100.509 38.941,101.509 U5.13 37.592,101.509 37.371,101.73 37.371,102.288 37.592,102.509 U5.11 ; U5.10 37.631,103.009 37.414,103.226 37.414,105.258 37.666,105.509 U5.5 ; U5.1 U5.1@38.176,107.509 ; U5.25 43.938,98.958 44.141,99.162 44.762,99.162 46.609,101.009 48.495,101.009 ; U5.51 46.438,110.012 v1@48.332,110.012 ; v1(47.092,102.413) 48.495,101.009 ; v1(48.387,109.957) 48.387,107.29 48.668,107.009 U5.47 56.546,107.009 ; U5.35 48.495,101.009
  Top Layer w0.15: C32.2 C32.2@53.721,122.428 ; 54.098,109.605 56.896,109.605 ; 56.032,110.469 56.896,109.605 ; 56.42,115.748 57.277,116.605 57.499,116.605 ; 56.546,107.009 56.642,107.105 U1.96 59.741,107.105 ; 57.699,98.91 57.699,101.105 U1.108 59.741,101.105 ; U1.77 57.499,116.605 ; U1.73 57.506,118.605 57.264,118.364 57.264,116.84 57.499,116.605 ; 59.477,122.428 61.824,122.428 62.465,121.787 U1.68 ; U1.113 62.465,100.413 61.773,101.105 59.741,101.105 ; 66.294,122.504 66.294,121.613 66.38,121.527 66.38,121.04 66.55,120.87 66.55,119.383 66.793,119.14 67.103,119.14 67.168,119.075 69.262,119.075 69.465,119.278 U1.54 ; U1.130 70.965,103.243 70.983,103.261 72.532,103.261 ; v1(71.965,118.262) U1.49 ; U1.136 73.965,101.828 72.532,103.261 ; 77.191,108.35 78.435,107.105 78.638,107.105 ; U1.13 78.638,107.105 ; U1.25 77.622,113.105 75.052,113.105 73.405,113.105 72.111,111.811 v1(72.111,106.553) 72.111,103.683 72.532,103.261 ; v1(81.686,100.711) 81.686,101.445 81.026,102.105 U1.3 78.638,102.105 77.978,102.765 77.978,106.445 78.638,107.105 ; 56.896,109.605 U1.91 59.741,109.605 60.02,109.326 60.02,107.384 59.741,107.105 ; 59.741,101.105 59.944,101.308 59.944,106.902 59.741,107.105
  Top Layer w0.3: D1.2 30.074,119.126 30.912,119.964 ; J2.5 30.107,126.306 30.912,125.501 ; C29.2 30.937,125.476 30.912,125.501 ; 33.544,112.817 33.544,114.462 30.912,117.094 30.912,119.964 ; v1(33.782,109.83) 36.103,107.509 ; U4.GND 37.186,128.346 ; 37.414,92.946 39.403,90.957 P2.1 39.403,86.97 40.495,85.877 66.98,85.877 68.072,86.97 68.072,88.682 S1.1 ; U5.11 U5.10 ; v1(42.545,126.045) C28.2 ; v1(42.584,121.158) 42.545,121.197 C28.2 ; U3.GND 45.695,128.422 45.415,128.143 37.389,128.143 37.186,128.346 ; v1@48.332,110.012 v1(48.387,109.957) ; U6.5 47.6,115.824 47.396,116.027 47.396,118.059 47.701,118.364 U6.7 52.019,118.364 52.959,119.304 52.959,122.428 C32.2 ; D2.2 52.763,110.94 54.098,109.605 ; 56.032,110.469 56.032,112.37 54.394,114.008 54.394,114.956 55.186,115.748 56.42,115.748 ; P2.10 57.403,95.255 56.974,95.684 56.974,98.185 57.699,98.91 ; v1(63.729,122.936) 62.961,123.952 62.61,124.303 61.352,124.303 59.477,122.428 53.721,122.428 53.721,123.749 54.712,124.739 54.712,135.738 56.896,137.922 69.063,137.922 71.257,135.727 71.257,128.143 U7.4 75.489,128.143 76.514,129.168 U2.2 ; 66.294,122.504 v1(66.98,123.19) ; v1@75.052,113.105 v1(75.052,113.177) ; 77.191,108.35 77.191,112.673 77.622,113.105 ; 30.912,119.964 30.912,125.501 ; 37.186,128.346 37.186,124.841 38.202,123.825 C28.2
  Bottom Layer w0.3: P1.3 P1.4 P2.1 ; C37.1 C38.1 ; v1(33.782,109.83) 33.782,105.664 32.827,104.709 ; C40.1 C39.1 40.701,91.694 ; C30.1 39.827,134.808 38.913,133.894 38.913,130.571 43.439,126.045 ; v1(42.545,126.045) 43.439,126.045 ; v1(42.584,121.158) R14.2 ; P2.4 45.403,87.173 ; v1(47.092,102.413) 46.482,103.022 44.044,103.022 41.808,105.258 34.9,105.258 34.244,104.602 ; v1(48.387,109.957) 50.546,109.957 C48.1 C49.1 ; P2.6 49.403,87.173 ; P2.8 53.403,87.173 ; P2.10 57.403,87.173 ; C20.1 C24.1 67.945,96.078 67.498,95.631 C12.1 ; C33.1 62.961,127.828 ; C5.1 63.053,105.664 63.256,105.461 68.174,105.461 ; v1(63.729,122.936) 62.961,123.704 62.961,127.828 ; v1(66.98,123.19) 69.037,125.247 69.037,127.828 ; C25.1 C26.1 74.778,114.493 75.052,114.767 ; v1(71.965,118.262) C41.1@75.052,121.349 ; C14.1 73.086,92.212 ; C8.1 76.175,100.711 77.265,101.801 80.198,101.801 C9.1 v1(81.686,100.711) ; v1(75.052,113.177) 75.052,114.767 ; C50.1 72.375,106.365 72.187,106.553 v1(72.111,106.553) C6.1 68.387,105.674 ; C11.1 86.741,100.711 90.358,97.094 R57.1 ; C2.1 87.691,89.139 ; C36.1 89.154,126.985 92.517,123.622 R55.1 92.517,121.107 ; R54.1 93.472,130.251 90.983,130.251 90.145,131.089 73.152,131.089 72.695,130.632 72.695,128.082 72.949,127.828 ; R56.1 100.584,116.205 ; C51.1 108.102,132.715 109.144,131.674 109.144,121.691 106.655,119.202 100.584,119.202 100.381,118.999 100.381,116.408 100.584,116.205 ; C38.1 32.827,104.709 ; C38.1 34.244,104.602 ; 32.827,104.709 34.138,104.709 34.244,104.602 ; 34.244,104.602 35.382,103.464 35.382,93.929 37.617,91.694 40.701,91.694 ; P2.1 39.403,87.14 39.929,86.614 44.844,86.614 45.403,87.173 ; P2.1 39.403,90.322 40.701,91.62 40.701,91.694 ; 43.439,126.045 51.181,126.045 C27.1 53.635,126.939 54.478,127.782 C31.1 59.08,134.874 60.325,133.629 67.894,133.629 69.037,132.486 69.037,127.828 ; 45.403,87.173 45.962,86.614 48.87,86.614 49.403,87.147 49.403,87.173 ; 49.403,87.173 50.089,86.487 52.717,86.487 53.403,87.173 ; 53.403,87.173 54.089,86.487 56.717,86.487 57.403,87.173 ; 57.403,87.173 57.403,86.945 57.861,86.487 66.396,86.487 67.498,87.589 C12.1 ; 62.961,127.828 63.956,128.823 66.025,128.823 67.02,127.828 C34.1 69.037,127.828 ; C12.1 69.088,92.964 70.485,91.567 72.441,91.567 73.086,92.212 ; 68.174,105.461 68.387,105.674 ; 68.174,105.461 67.224,104.511 67.224,102.819 67.64,102.403 69.366,102.403 70.714,103.751 73.152,103.751 73.632,103.271 93.971,103.271 94.818,102.424 94.818,97.333 94.579,97.094 R57.1 ; 68.174,105.461 68.184,105.461 68.387,105.664 68.387,105.674 ; 69.037,127.828 72.949,127.828 ; 72.949,127.828 C35.1 73.787,125.496 75.052,124.231 75.052,122.767 ; 73.086,92.212 73.086,92.05 73.569,91.567 78.191,91.567 78.674,92.05 C15.1 80.035,92.964 84.861,88.138 86.69,88.138 87.691,89.139 ; 75.052,114.767 C41.1@75.052,121.349 ; C41.1@75.052,121.349 C41.1 75.052,122.767 ; 75.052,122.767 75.59,123.305 80.01,123.305 81.987,121.328 83.607,121.328 83.607,121.224 C44.1 87.988,121.224 89.613,119.599 91.009,119.599 92.517,121.107 ; 87.691,89.139 87.691,89.118 88.925,87.884 93.025,87.884 C4.1 93.025,93.142 93.726,93.843 R57.1 ; 92.517,121.107 92.517,117.043 93.355,116.205 100.584,116.205
GREEN: P2.7 U1.117 | length 24.1
  Top Layer w0.15: 64.465,95.856 U1.117
  Top Layer w0.3: P2.7 51.403,87.143 51.613,86.933 57.85,86.933 58.293,87.376 58.293,91.161 60.951,93.819 62.428,93.819 64.465,95.856
h_sync: P2.3 U1.112 | length 28.6
  Top Layer w0.15: 57.709,98.015 60.329,100.635 61.762,100.635 61.965,100.432 U1.112
  Top Layer w0.3: 57.709,98.015 57.709,95.745 58.395,95.06 v1(58.395,94.668)
  Bottom Layer w0.3: P2.3 43.403,90.424 43.606,90.627 48.031,90.627 48.507,91.103 54.829,91.103 v1(58.395,94.668)
LEFT_PONG: R56.2 S4.1 U1.124 | length 71.2
  Top Layer w0.15: U1.124 v1@67.965,103.144
  Top Layer w0.3: v1@67.965,103.144 v1(68.199,103.378) ; v1(105.562,115.57) 110.145,115.57 S4.1
  Bottom Layer w0.3: v1(68.199,103.378) 69.494,103.378 70.357,104.241 73.508,104.241 73.988,103.761 95.654,103.761 101.067,98.349 103.861,98.349 104.572,99.06 104.572,116.561 ; R56.2 103.51,118.105 104.572,117.043 104.572,116.561 ; v1(105.562,115.57) 104.572,116.561
NetD1_1: D1.1 R6.2 | length 4.8
  Top Layer w0.3: D1.1 R6.2
NetR13_1: R13.1 U5.14 | length 59.2
  Top Layer w0.125: 35.934,101.009 U5.14
  Top Layer w0.3: v1(28.905,117.043) 28.905,107.747 30.15,106.502 30.15,99.085 34.011,99.085 35.934,101.009
  Bottom Layer w0.3: v1(28.905,117.043) 32.309,120.447 34.823,120.447 34.976,120.294 36.043,120.294 36.449,120.701 36.449,123.114 37.389,124.054 52.934,124.054 54.478,122.509 R13.1
NetR14_1: R14.1 U5.6 | length 28.7
  Top Layer w0.125: U5.6 38.817,105.009 38.98,105.173 38.98,109.415
  Top Layer w0.3: v1(34.519,113.877) 38.98,109.415
  Bottom Layer w0.3: v1(34.519,113.877) 34.519,115.011 38.405,118.897 46.33,118.897 47.498,120.066 R14.1
NetR18_2: R18.2 R19.1 U6.4 | length 10.3
  Top Layer w0.3: v1(42.266,114.275) 42.266,115.824 U6.4
  Bottom Layer w0.3: R19.1 39.116,113.792 40.259,112.649 42.469,112.649 ; v1(42.266,114.275) 42.266,113.69 42.799,113.157 42.799,112.979 42.469,112.649 ; R18.2 42.469,112.649
NetR50_1: R50.1 S2.3 | length 9.2
  Top Layer w0.3: v1(100.076,122.961) S2.3
  Bottom Layer w0.3: v1(100.076,122.961) 100.355,122.682 R50.1
NetR51_1: R51.1 S3.3 | length 5.3
  Top Layer w0.3: S3.3 94.416,113.966 v1(94.793,113.589)
  Bottom Layer w0.3: v1(94.793,113.589) 95.072,113.589 95.555,114.071 96.901,114.071 R51.1
NetR52_1: R52.1 S4.3 | length 27.8
  Top Layer w0.3: v1(95.352,111.557) 111.978,111.557 114.645,114.224 S4.3
  Bottom Layer w0.3: R52.1 93.909,110.114 v1(95.352,111.557)
NetR53_1: R53.1 S5.3 | length 12.1
  Top Layer w0.3: v1(103.566,99.918) 104.576,98.908 S5.3
  Bottom Layer w0.3: v1(103.566,99.918) R53.1
PWREN#: U5.60
PWRSAV#: R1.2 U5.59 | length 4.9
  Top Layer w0.125: U5.59 42.438,108.692 v1(43.358,107.772)
  Bottom Layer w0.3: v1(43.358,107.772) 44.704,107.772 45.151,107.325 R1.2
RED: P2.5 U1.115 | length 23.4
  Top Layer w0.15: 63.465,96.942 U1.115
  Top Layer w0.3: v1(61.366,94.844) 63.465,96.942
  Bottom Layer w0.3: P2.5 47.403,89.713 48.031,89.713 48.932,90.613 55.865,90.613 57.327,92.075 60.401,92.075 61.366,93.04 v1(61.366,94.844)
RESET_PONG: R54.2 S2.1 U1.132 | length 71.2
  Top Layer w0.15: U1.132 v1@71.965,102.279
  Top Layer w0.3: v1(71.958,102.286) v1@71.965,102.279 ; v1(90.043,101.295) 93.015,104.267 93.015,117.856 93.853,118.694 101.35,118.694 104.576,121.92 S2.1 104.576,127.402 104.038,127.94 v1(98.613,127.94)
  Bottom Layer w0.3: v1(71.958,102.286) 71.963,102.291 89.047,102.291 v1(90.043,101.295) ; R54.2 94.285,132.268 v1(98.613,127.94)
RIGHT_PONG: R55.2 S3.1 U1.127 | length 45.5
  Top Layer w0.15: U1.127 v1@69.465,104.373
  Top Layer w0.3: v1(69.139,104.699) v1@69.465,104.373 ; v1(90.576,120.574) 89.916,119.913 S3.1 89.916,112.42 91.059,111.277 v1(91.059,104.818)
  Bottom Layer w0.3: v1(69.139,104.699) 69.258,104.818 v1(91.059,104.818) ; v1(90.576,120.574) 90.617,120.614 R55.2
SIWU: R5.2 U5.55 | length 26.2
  Top Layer w0.125: U5.55 v1@44.438,110.68
  Top Layer w0.3: v1(44.044,111.074) v1@44.438,110.68
  Bottom Layer w0.3: v1(44.044,111.074) 42.383,109.413 42.383,106.918 45.781,103.52 52.045,103.52 52.186,103.661 52.803,104.278 52.832,104.278 52.832,104.677 53.182,105.027 53.182,105.412 53.188,105.417 53.188,106.883 52.578,107.493 50.8,107.493 50.292,106.985 R5.2
START_PONG: R57.2 S5.1 U1.121 | length 44.4
  Top Layer w0.15: U1.121 v1(66.465,101.913)
  Top Layer w0.3: v1(91.338,99.695) 92.735,98.298 S5.1
  Bottom Layer w0.3: v1(66.465,101.913) 70.077,101.913 71.425,103.261 72.492,103.261 72.972,102.781 90.64,102.781 93.726,99.695 ; v1(91.338,99.695) 93.726,99.695 ; R57.2 93.726,99.695
SUPEND#: U5.36
TCK: RA3A.1 U1.109 | length 8
  Top Layer w0.15: v1@59.584,96.72 60.465,97.602 U1.109
  Top Layer w0.3: v1(59.241,96.377) v1@59.584,96.72
  Bottom Layer w0.3: RA3A.1 56.144,94.488 58.034,96.377 v1(59.241,96.377)
TDI: RA3B.1 U1.110 | length 13.6
  Top Layer w0.15: v1@60.965,96.772 U1.110
  Top Layer w0.3: v1(60.815,96.622) v1@60.965,96.772
  Bottom Layer w0.3: RA3B.1 53.465,94.488 53.668,94.691 53.668,96.723 54.328,97.384 60.053,97.384 v1(60.815,96.622)
TDO: RA3C.1 U1.106 | length 18.4
  Top Layer w0.15: v1(52.146,92.227) 52.146,97.123 57.129,102.105 U1.106
  Bottom Layer w0.3: RA3C.1 49.53,92.659 50.368,91.821 51.74,91.821 v1(52.146,92.227)
TMS: RA3D.1 U1.107 | length 24.3
  Top Layer w0.15: 56.484,100.63 57.46,101.605 U1.107
  Top Layer w0.3: v1(46.609,91.948) 47.422,91.135 55.702,91.135 56.484,91.917 56.484,100.63
  Bottom Layer w0.3: v1(46.609,91.948) RA3D.1
USB_D_N: J2.2 U5.7 | length 38.5
  Top Layer w0.125: U5.7 39.091,104.509 39.436,104.855
  Top Layer w0.2: J2.2 32.512,133.603
  Top Layer w0.3: 32.512,133.603 34.122,131.993 34.122,124.485 32.801,123.165 31.41,123.165 31.41,119.154 39.473,111.091 39.473,108.661 39.436,108.624 39.436,104.855
USB_D_P: J2.3 U5.8 | length 41.1
  Top Layer w0.125: U5.8 39.497,104.009
  Top Layer w0.2: J2.3 31.106,132.953 31.572,132.486
  Top Layer w0.3: v1(31.572,129.362) 31.572,132.486 ; 39.497,104.009 40.411,104.923 v1(40.411,107.137)
  Bottom Layer w0.3: v1(31.572,129.362) 27.915,125.705 27.915,115.265 29.261,113.919 32.944,113.919 39.726,107.137 v1(40.411,107.137)
v_sync: P2.2 U1.81 | length 86
  Top Layer w0.15: v1(55.956,114.605) U1.81
  Top Layer w0.3: P2.2 41.403,86.892 41.859,86.436 65.227,86.436 66.573,87.782 66.573,94.59 68.758,96.774 77.622,96.774 78.461,97.612 78.461,100.609 73.101,105.969 v1(73.101,110.617)
  Bottom Layer w0.3: v1(55.956,114.605) 57.912,116.561 61.036,116.561 61.366,116.23 62.84,116.23 68.453,110.617 v1(73.101,110.617)
VCC1V2: C2.2 C4.2 C29.1 C31.2 U1.19 U1.28 U1.52 U1.89 U1.128 U4.HEATSINK U4.VOUT | length 200.1
  Top Layer w0.15: U1.89 66.726,110.605 ; v1(62.23,135.56) 69.273,128.517 69.273,126.868 70.465,125.676 U1.52 70.465,116.967 ; U1.128 69.965,103.696 ; 70.129,107.201 66.726,110.605 ; U1.19 80.997,110.105 81.229,110.338 81.229,114.402 81.026,114.605 U1.28 72.827,114.605 70.465,116.967 ; 66.726,110.605 69.088,110.605 70.465,111.982 70.465,116.967
  Top Layer w0.3: C29.1 34.138,122.174 34.976,123.012 34.976,130.048 36.195,131.267 39.091,131.267 39.497,130.861 ; U4.VOUT 39.497,130.861 ; U4.HEATSINK v1@39.497,132.715 ; v1(39.903,132.715) v1@39.497,132.715 ; 69.965,103.696 70.129,103.861 70.129,107.201 ; v1(89.738,89.916) 89.052,90.602 89.052,128.422 v1(91.948,131.318) ; 39.497,130.861 v1@39.497,132.715
  Bottom Layer w0.3: v1(39.903,132.715) 41.859,130.759 51.664,130.759 52.578,131.674 C31.2 52.578,135.738 52.807,135.966 61.824,135.966 v1(62.23,135.56) 87.706,135.56 v1(91.948,131.318) ; C2.2 85.791,91.008 88.646,91.008 v1(89.738,89.916) C4.2
VCC5V0_USB: C30.2 C32.1 J2.1 P1.1 P1.2 R6.1 U3.VIN U4.VIN | length 104.7
  Top Layer w0.2: 29.134,125.882 29.134,134.253 J2.1@30.099,134.253 ; 30.099,137.363 J2.1@30.099,134.253 ; J2.1 J2.1@30.099,134.253
  Top Layer w0.3: P1.2 29.083,106.316 26.492,108.906 26.492,125.095 29.068,125.095 29.398,124.765 ; 29.134,125.882 29.398,125.618 29.398,124.765 ; R6.1 29.398,124.765 ; 30.099,137.363 31.242,138.506 40.361,138.506 41.808,137.058 ; U4.VIN 41.808,130.861 ; v1(42.977,131.75) 42.697,131.75 41.808,130.861 ; C32.1 51.206,125.73 50.317,126.619 U3.VIN 50.317,137.363 49.378,138.303 42.748,138.303 41.808,137.363 41.808,137.058 ; 41.808,130.861 41.808,137.058
  Bottom Layer w0.3: P1.1 P1.2 ; C30.2 42.555,132.908 42.977,132.486 v1(42.977,131.75)
VCORE: C33.2 C34.2 C41.2 U5.12 U5.37 U5.49 U5.64 | length 126.7
  Top Layer w0.125: U5.12 39.063,102.009 39.343,101.729 ; 39.938,111.319 U5.64 39.938,108.43 40.234,108.134 ; 47.438,105.554 U5.49 ; 48.067,102.304 48.362,102.009 U5.37 49.83,102.009 50.035,101.803 50.035,97.536
  Top Layer w0.15: 46.888,105.004 47.438,105.554
  Top Layer w0.3: v1(35.433,121.31) 34.442,120.32 34.442,116.815 39.938,111.319 ; 39.343,101.729 39.343,100.229 39.296,100.182 39.296,94.285 40.373,93.208 43.518,93.208 43.723,93.413 45.912,93.413 50.035,97.536 ; 40.234,108.134 41.398,108.134 42.852,106.68 46.685,106.68 46.888,106.477 46.888,105.004 46.888,104.038 48.067,102.86 48.067,102.304
  Bottom Layer w0.3: v1(35.433,121.31) 35.433,123.723 36.573,124.863 52.752,124.863 57.617,129.728 61.3,129.728 ; C34.2 C33.2 61.3,129.728 ; C41.2 66.177,121.92 65.364,121.107 65.364,117.45 65.126,117.211 63.891,117.211 61.001,120.101 61.001,122.387 59.309,124.079 59.309,125.621 59.37,125.682 59.37,126.489 59.309,126.55 59.309,127.737 61.3,129.728
VPHY: C48.2 C49.2 FB3.1 U5.4 | length 43.4
  Top Layer w0.125: 36.398,104.841 37.567,106.009 U5.4
  Top Layer w0.3: v1(36.398,103.937) 36.398,104.841
  Bottom Layer w0.3: v1(36.398,103.937) 37.821,102.514 ; FB3.1 37.592,99.187 37.262,99.517 37.262,102.006 37.769,102.514 37.821,102.514 ; C48.2 C49.2 55.59,111.186 56.261,110.515 56.261,103.378 55.559,102.676 55.218,102.752 54.506,103.464 53.698,103.464 52.723,102.489 51.466,102.489 50.103,101.126 46.587,101.126 45.199,102.514 37.821,102.514
VPLL: C39.2 C40.2 FB2.1 U5.9 | length 15.1
  Top Layer w0.125: U5.9 39.112,103.509 40.31,102.311
  Top Layer w0.3: v1(40.31,99.593) 40.31,102.311
  Bottom Layer w0.3: C39.2 C40.2 38.801,96.865 39.827,97.892 41.326,97.892 41.783,98.349 FB2.1 40.716,99.187 v1(40.31,99.593)
pads on no net: J2.4 J2.P$8 J2.P$9 J2.P$10 J2.P$11 P2.11 P2.12 S1.2 S1.4 S1.5 S2.2 S2.4 S2.5 S3.2 S3.4 S3.5 S4.2 S4.4 S4.5 S5.2 S5.4 S5.5 U1.1 U1.2 U1.5 U1.6 U1.7 U1.8 U1.9 U1.10 U1.11 U1.12 U1.14 U1.15 U1.16 U1.17 U1.21 U1.22 U1.23 U1.24 U1.26 U1.27 U1.29 U1.30 U1.32 U1.33 U1.34 U1.35 U1.40 U1.41 U1.43 U1.44 U1.45 U1.46 U1.47 U1.48 U1.51 U1.55 U1.56 U1.57 U1.58 U1.59 U1.66 U1.67 U1.72 U1.74 U1.75 U1.78 U1.79 U1.80 U1.82 U1.83 U1.84 U1.85 U1.87 U1.88 U1.111 U1.114 U1.116 U1.118 U1.120 U1.123 U1.126 U1.131 U1.133 U1.134 U1.137 U1.138 U1.139 U1.140 U1.141 U1.142 U1.143 U1.144 U5.21 U5.22 U5.23 U5.24 U5.26 U5.27 U5.28 U5.29 U5.30 U5.32 U5.33 U5.34 U5.57 U5.58 U5.PAD
copper on no net: | length 0.1
  Bottom Layer w0.254: 53.975,102.489 54.102,102.489

## Polygon pours and split planes (outlines as drawn)
GND on Bottom Layer "Bottom Layer-No Net" (solid, remove dead copper, pour order 0): 26.035,139.065 26.035,85.09 121.285,85.09 121.285,139.065
GND on Top Layer "Bottom Layer-No Net" (solid, remove dead copper, pour order 2): 26.035,139.065 26.035,85.09 121.285,85.09 121.285,139.065

## Other copper
Bottom Layer:
  text "ALIREZA ALIPOUR" at 120.65,85.979 h1.52

## Silkscreen, mask and mechanical layers (free items; w line width, h text height)
Top Overlay:
  text "RIGHT" at 109.601,125.087 h3 r90
  text "POWER" at 30.861,118.677 h1.5
  text "DONE" at 51.435,108.712 h2
  text "START" at 99.441,107.815 h3 r90
  text "RESET" at 119.634,107.815 h3 r90
  text "LEFT" at 109.601,91.382 h3 r90
  text "CONFIG" at 69.851,85.725 h1